# Altium PCB PrintNC_GRBLHAL_Breakout_QWIIC_CARD.pcbdoc (part 1 of 2)
Units mm, origin at the board's own origin, x right, y up, seen from the top; angles counter-clockwise.
Board outline 32.38 x 20 mm, 2 copper layers (Top Layer, Bottom Layer); 19 components, 15 nets, 2519 pads, 22 vias.
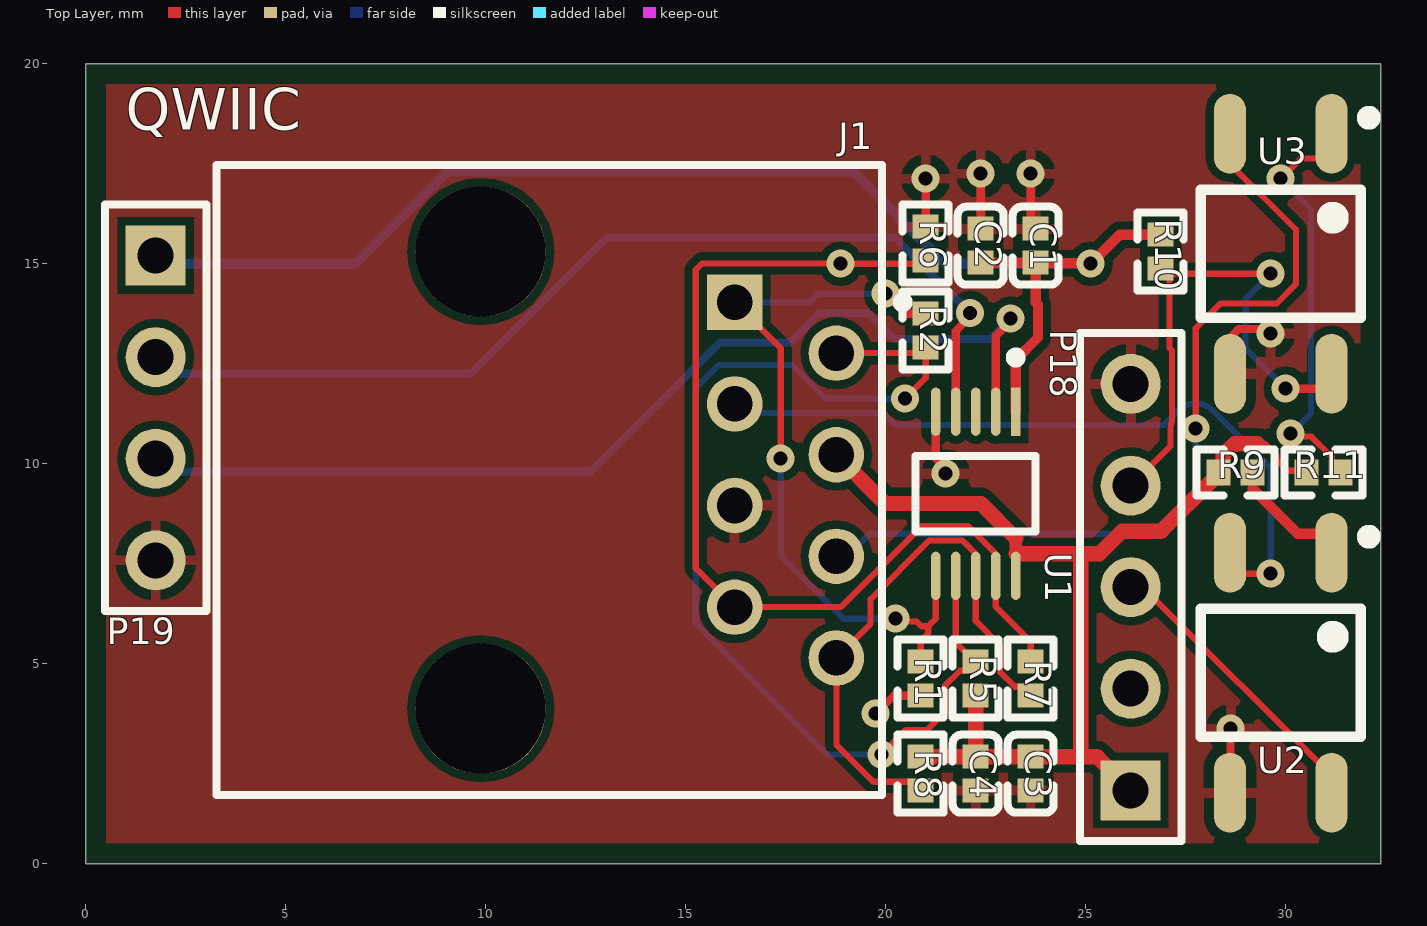
[diagram p0: Top Layer view]
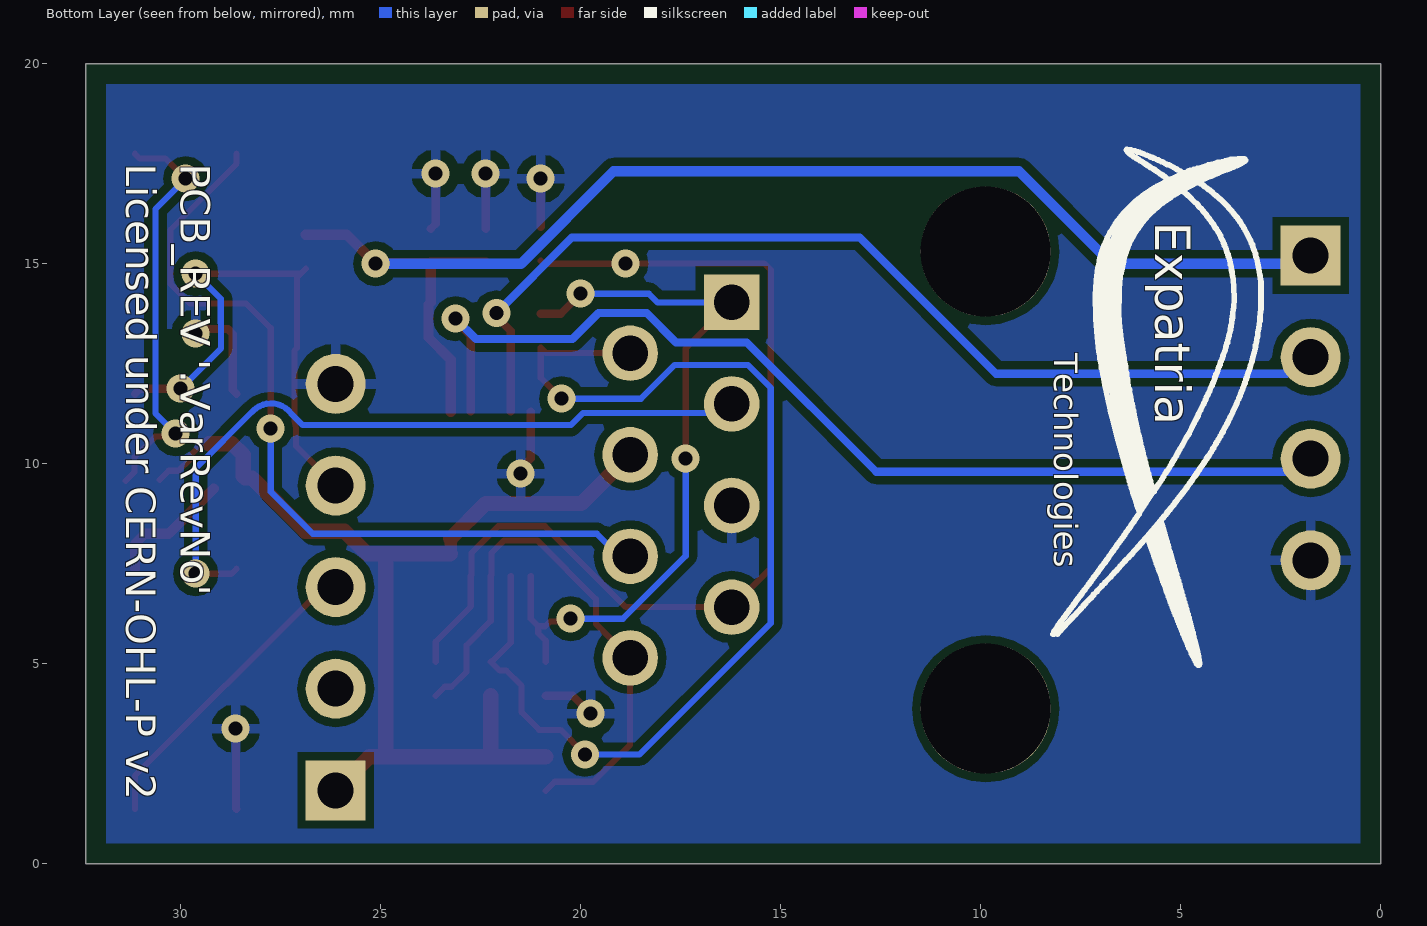
[diagram p1: Bottom Layer view, seen from below]
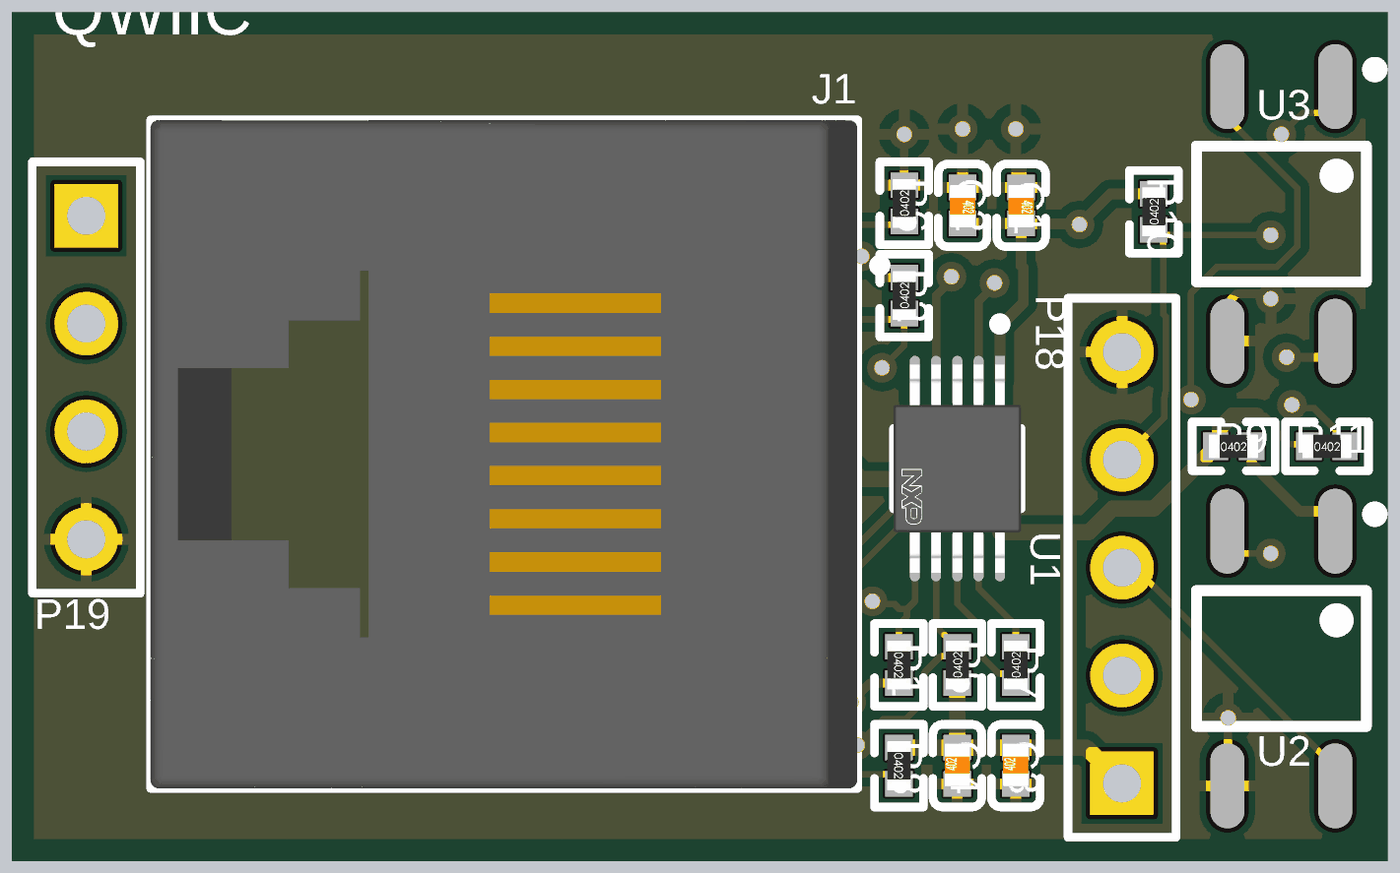
[diagram p3: 3D render of the assembled board from above, using the file's embedded part models]

## Layer stack, top to bottom
Top Solder: solder mask 0.0102, Solder Resist, Dk 3.5
Top Layer: signal copper 0.0356
Dielectric1: dielectric 0.32, FR-4, Dk 4.8
Bottom Layer: signal copper 0.0356
Bottom Solder: solder mask 0.0102, Solder Resist, Dk 3.5

## Board outline
0,0 0,20 32.375,20 32.375,0

## Design rules (kind name [scope] priority, off if disabled: settings)
BoardOutlineClearance [OnLayer('Top Layer')] p1: gap=0.508 ignorepadtopadclearanceinfootprint=FALSE
BoardOutlineClearance BoardOutlineClearance_3 [OnLayer('GND')] p2: gap=0.508 ignorepadtopadclearanceinfootprint=FALSE
BoardOutlineClearance BoardOutlineClearance_2 [OnLayer('PWR')] p3: gap=0.508 ignorepadtopadclearanceinfootprint=FALSE
BoardOutlineClearance BoardOutlineClearance_1 [OnLayer('Bottom Layer')] p4: gap=0.508 ignorepadtopadclearanceinfootprint=FALSE
Clearance [All] p1: gap=0.203 ignorepadtopadclearanceinfootprint=TRUE except(0: SMDPad-Hole Fill-Hole Poly-Hole Region-Hole Text-Hole; 0.254: Arc-Text Arc-Hole Track-Text Track-Hole SMDPad-Text THPad-Text Via-Via Via-Text Fill-Fill Fill-Poly Fill-Region Fill-Text Poly-Poly Poly-Region Poly-Text Region-Region Region-Text Text-Text; 0.305: SMDPad-Via THPad-Via; 0.5: THPad-Hole Via-Hole; 0.508: SMDPad-SMDPad SMDPad-THPad THPad-THPad)
Clearance "Pad Clearance" [IsPad vs IsPad] p2: gap=0.254 ignorepadtopadclearanceinfootprint=TRUE except(0: Arc-Hole Track-Hole SMDPad-Hole THPad-Hole Via-Hole Fill-Hole Poly-Hole Region-Hole Text-Hole; 0.203: Arc-Arc Arc-Track Arc-Fill Arc-Poly Arc-Region Track-Track Track-Fill Track-Poly Track-Region SMDPad-Fill SMDPad-Poly SMDPad-Region THPad-Fill THPad-Poly THPad-Region Via-Fill Via-Poly Via-Region; 0.305: SMDPad-Via THPad-Via; 0.508: SMDPad-SMDPad SMDPad-THPad THPad-THPad)
DiffPairsRouting [All] p1: maxlimit=0.254 minlimit=0.203 mostfreqgap=0.203 toplayer_minwidth=0.152 toplayer_maxwidth=0.381 toplayer_prefwidth=0.254 bottomlayer_minwidth=0.152 bottomlayer_maxwidth=0.381 bottomlayer_prefwidth=0.254 maxuncoupledlength=12.7
HoleSize [All] p1: absolutevalues=TRUE maxlimit=5.08 minlimit=0.025 maxpercent=80.000 minpercent=20.000
MinimumAnnularRing [All] p1: minimumring=0.16
MinimumSolderMaskSliver [All] p1: minsoldermaskwidth=0.127
PolygonConnect [All] p1: connectstyle=Relief reliefconductorwidth=0.254 reliefentries=4 polygonreliefangle="90 Angle" airgapwidth=0.254
RoutingVias [All] p1: holewidth=0.711 width=1.27 viastyle="Through Hole" minholewidth=0.711 minwidth=1.27 maxholewidth=0.711 maxwidth=1.27 useviatemplates=TRUE viatemplateguid#1={29321985-CF2A-4769-A0B6-67998678A9C6} viatemplatename#1=v70h35m0mx0
SilkToSolderMaskClearance SilkscreenOverComponentPads [IsPad] p1: minsilkscreentomaskgap=0.254 clearancetoexposedcopper=TRUE
SolderMaskExpansion [All] p1: expansion=0.102 istentingtop=FALSE
ViasUnderSMD [All] p1: allowed=FALSE
Width [All] p1: maxlimit=5.08 minlimit=0.152 preferedwidth=0.203 minimp=50.000000 maximp=50.000000 favimp=50.000000
26 further rules are at their usual default settings.

## Components (designator, comment, footprint, x,y, rotation, side; value= is the part's Value field where it differs from the comment)
C1 "1.0uF" 0402_C 23.75,15.45 r270 top
C2 "100nF" 0402_C 22.375,15.45 r270 top
C3 "1.0uF" 0402_C 23.625,2.25 r90 top
C4 "100nF" 0402_C 22.25,2.25 r90 top
J1 "5555799-1" FP-5555799-1-MFG 11.585,9.59 r270 top
P18 "Header 5" HDR1X5 26.125,1.835 r90 top (schematic designator P14)
P19 "Header 4" HDR1X4 1.75,15.205 r270 top (schematic designator P15)
R1 "470Ω ±1%" 0402_R 20.875,4.625 r270 top
R2 "100Ω ±1%" 0402_R 21,13.325 r90 top
R5 "470Ω ±1%" 0402_R 22.25,4.625 r90 top
R6 "470Ω ±1%" 0402_R 21,15.5 r90 top
R7 "100Ω ±1%" 0402_R 23.625,4.625 r90 top
R8 "470Ω ±1%" 0402_R 20.875,2.25 r270 top
R9 "680Ω ±1%" 0402_R 28.75,9.775 r0 top
R10 "10KΩ ±1%" 0402_R 26.875,15.3 r90 top
R11 "680Ω ±1%" 0402_R 30.95,9.775 r0 top
U1 "PCA9615DPJ DNI" FP-SOT552-1-IPC_C 22.25,9.25 r270 top
U2 "EL357N(B)(TA)-G" SOP-4_P2.54 29.875,4.775 r270 top
U3 "EL357N(B)(TA)-G" SOP-4_P2.54 29.875,15.25 r270 top

## Footprints (in the part's own frame and the unit in brackets; to place one, negate y for a bottom-side part, rotate by r counter-clockwise, add the part's x,y. Pads: shape width x height; smd on the part's side, far side on the other; paste and mask are expansions set on the pad)
0402_C [mm]
  rect 0.6x0.65 smd mask+0.051: 1(-0.425,0) 2(0.425,0)
  silkscreen extent -0.97,-0.58 0.98,0.58, body extent -0.48,-0.3 0.52,0.3, height 0.2
0402_R [mm]
  rect 0.6x0.65 smd mask+0.051: 1(-0.425,0) 2(0.425,0)
  silkscreen extent -0.97,-0.58 0.97,0.58, body extent -0.57,-0.27 0.58,0.28, height 0.41
FP-5555799-1-MFG [mm]
  rect 1.39x1.39 hole 0.89 paste-1000 mask+0: 1(-4.445,4.64)
  round 1.39 hole 0.89 paste-1000 mask+0: 2(-3.175,7.18) 3(-1.905,4.64) 4(-0.635,7.18) 5(0.635,4.64) 6(1.905,7.18) 7(3.175,4.64) 8(4.445,7.18)
  round 3.25 hole 3.25 unplated paste-1000 mask+0: ""(-5.715,-1.71) ""(5.715,-1.71)
  silkscreen extent -7.88,-8.32 7.88,8.96, body extent -7.98,-8.42 7.98,8.42, height 0.25
FP-SOT552-1-IPC_C [mm]
  rect 1.209x0.236 smd paste+0 mask+0: 1(-2.052,1)
  rrect100% 1.209x0.236 smd paste+0 mask+0: 2(-2.052,0.5) 3(-2.052,0) 4(-2.052,-0.5) 5(-2.052,-1) 6(2.052,-1) 7(2.052,-0.5) 8(2.052,0) 9(2.052,0.5) 10(2.052,1)
  silkscreen extent -3.53,-1.5 0.95,1.5, body extent -2.76,-1.6 2.76,1.6, height 0.25
HDR1X4 [mm] "Connector; Header; 4 Position"
  rect 1.5x1.5 hole 0.9: 1(0,0)
  round 1.5 hole 0.9: 2(2.54,0) 3(5.08,0) 4(7.62,0)
  silkscreen extent -1.27,-1.27 8.89,1.27
HDR1X5 [mm] "Connector; Header; 5 Position"
  rect 1.5x1.5 hole 0.9: 1(0,0)
  round 1.5 hole 0.9: 2(2.54,0) 3(5.08,0) 4(7.62,0) 5(10.16,0)
  silkscreen extent -1.27,-1.27 11.43,1.27
SOP-4_P2.54 [mm]
  oval 2x0.8 smd: 1(-3,1.27) 2(-3,-1.27) 3(3,-1.27) 4(3,1.27)
  silkscreen extent -3.55,-2 1.6,2.35

## Part data
C1 C3: library part "0402 1.0uF (105) 10% 25V", "Chip capacitor", Capacitance=1uF, Manufacturer="Samsung Electro-Mechanics", Package=0402, PartNumber=CL05A105KA5NQNC, SuppliersPartNumber=C52923, Tolerance=10%, Voltage=25V, ComponentLink1Description="Supplier link", ComponentLink1URL=http://www.szlcsc.com/product/details_53938.html, Supplier=LC
C2 C4: library part "0402 100nF (104) 10% 16V", "Chip capacitors", Manufacturer="Samsung Electro-Mechanics", Package=0402, PartNumber=CL05B104KO5NNNC, SuppliersPartNumber=C1525, Tolerance=10%, Voltage=16V, Capacitance=100nF, ComponentLink1Description="Supplier link", ComponentLink1URL=http://www.szlcsc.com/product/details_1877.html, Supplier=LC
J1: library part CMP-03371-000003-1, "CONN MOD JACK 8P8C VERT UNSHLD", Manufacturer="TE Connectivity", SuppliersPartNumber=C305983, Temperature="-40°C to +85°C", Temperature Range High=+85°C, Temperature Range Low=-40°C, Device Class L1=Connectors, Device Class L2="Modular / Ethernet Connectors", Device Class L3=unset, Digikey Description="CONN MOD JACK 8P8C VERT UNSHLD", Is Female=yes, Manufacturer Part Number=5555799-1, Mouser Description="Conn RJ-45 F 8 POS 2.54mm Solder ST Thru-Hole 8 Terminal 1 Port Cat 3 Box/Package/Tray", Number of Contacts=8, Octopart=https://octopart.com/5555799-1-te+connectivity-39526335, Package=5555799-1, Pitch=2.54mm
P18: "Header, 5-Pin", SuppliersPartNumber=C124379, LatestRevisionDate=17-Jul-2002, LatestRevisionNote="Re-released for DXP Platform.", Publisher="Altium Limited"
P19: "Header, 4-Pin", SuppliersPartNumber=C124378, Publisher="Altium Limited"
R1 R5 R6 R8: library part "0402 470R (4700) 1%", "Chip resistor", Manufacturer="Uniroyal Elec", Package=0402, PartNumber=0402WGF4700TCE, Power=1/16W, Resistance=470Ω, SuppliersPartNumber=C25117, Tolerance=1%, ComponentLink1Description="Supplier link", ComponentLink1URL=http://www.szlcsc.com/product/details_25860.html, Supplier=LC
R2 R7: library part "0402 100R (1000) 1%", "Chip resistor", Manufacturer="Uniroyal Elec", Package=0402, PartNumber=0402WGF1000TCE, Power=1/16W, Resistance=100Ω, SuppliersPartNumber=C25076, Tolerance=1%, ComponentLink1Description="Supplier link", ComponentLink1URL=http://www.szlcsc.com/product/details_25819.html, Supplier=LC
R9 R11: library part "0402 680R (6800) 1%", "Chip resistor", Manufacturer="Uniroyal Elec", Package=0402, PartNumber=0402WGF6800TCE, Power=1/16W, Resistance=680Ω, SuppliersPartNumber=C25130, Tolerance=1%, ComponentLink1Description="Supplier link", ComponentLink1URL=http://www.szlcsc.com/product/details_25873.html, Supplier=LC
R10: library part "0402 10K (1002) 1%", "Chip resistor", Manufacturer="Uniroyal Elec", Package=0402, PartNumber=0402WGF1002TCE, Power=1/16W, Resistance=10KΩ, SuppliersPartNumber=C25744, Tolerance=1%, ComponentLink1Description="Supplier link", ComponentLink1URL=http://www.szlcsc.com/product/details_26487.html, Supplier=LC
U1: library part CMP-2000-06881-2, "IC REDRIVER I2C 2CH 10TSSOP", Ambient Temperature Range High=+85°C, Ambient Temperature Range Low=-40°C, Input Capacitance=7pF, Manufacturer=NXP, Manufacturer Part Number=PCA9615DPJ, Max Junction Temp=+125°C, Package=SOT552-1, SuppliersPartNumber=C2652385, Temperature="-40°C to +85°C", Device Class L1="Integrated Circuits (ICs)", Device Class L2="Interface ICs", Device Class L3="Signal Buffers", Digikey Description="IC REDRIVER I2C 2CH 10TSSOP", Footprint Url=https://www.nxp.com/docs/en/package-information/SOT552-1.pdf, Interface=I2C,SMBus, Ipc Land Pattern Name=SOP50P490X110-10, Mouser Description="Interface - Signal Buffers, Repeaters 2-channel multipoint Differential I2C-bus", Octopart=https://octopart.com/pca9615dpj-nxp+semiconductors-34972203, Sigbufrep Type=Buffer,ReDriver, Standoff Height=0.05mm, Temperature Range High=+85°C, Temperature Range Low=-40°C
U2 U3: library part EL357N(B)(TA)-G_[C6649], "贴片光耦", Package=SOP-4_P2.54, SuppliersPartNumber=C6649, ComponentLink1Description=供应商链接, ComponentLink1URL=http://www.szlcsc.com/product/details_7114.html, Supplier=LC

## Free pads (board coordinates)
  round 0.024 on Bottom Overlay: 1(2.989,14.356) 1(2.989,14.356) 1(2.995,13.866) 1(2.995,13.866) 1(2.995,13.937) 1(2.995,13.937) 1(2.995,14.491) 1(2.995,14.491) 1(3.014,14.691) 1(3.014,14.691) 1(3.021,13.57) 1(3.021,13.57) 1(3.021,13.647) 1(3.021,13.647) 1(3.027,14.724) 1(3.027,14.724) 1(3.046,13.389) 1(3.046,13.389) 1(3.046,14.885) 1(3.046,14.885) 1(3.072,13.196) 1(3.072,13.196) 1(3.072,13.273) 1(3.072,13.273) 1(3.079,15.007) 1(3.079,15.007) 1(3.098,13.08) 1(3.098,13.08) 1(3.098,13.118) 1(3.098,13.118) 1(3.098,15.13) 1(3.098,15.13) 1(3.124,15.188) 1(3.124,15.188) 1(3.131,12.925) 1(3.131,12.925) 1(3.131,12.964) 1(3.131,12.964) 1(3.131,15.246) 1(3.131,15.246) 1(3.175,15.362) 1(3.175,15.362) 1(3.208,15.472) 1(3.208,15.472) 1(3.221,12.557) 1(3.221,12.557) 1(3.233,15.51) 1(3.233,15.51) 1(3.253,15.581) 1(3.253,15.581) 1(3.266,12.416) 1(3.266,12.416) 1(3.266,12.441) 1(3.266,12.441) 1(3.337,12.177) 1(3.337,12.177) 1(3.337,12.203) 1(3.337,12.203) 1(3.356,12.132) 1(3.356,12.132) 1(3.356,12.151) 1(3.356,12.151) 1(3.362,15.787) 1(3.362,15.787) 1(3.369,12.1) 1(3.369,12.1) 1(3.369,12.119) 1(3.369,12.119) 1(3.382,17.586) 1(3.382,17.586) 1(3.388,15.833) 1(3.388,15.833) 1(3.388,17.606) 1(3.388,17.606) 1(3.395,12.016) 1(3.395,12.016) 1(3.395,12.041) 1(3.395,12.041) 1(3.395,17.567) 1(3.395,17.567) 1(3.395,17.58) 1(3.395,17.58) 1(3.408,17.618) 1(3.408,17.618) 1(3.414,11.971) 1(3.414,11.971) 1(3.414,11.99) 1(3.414,11.99) 1(3.421,15.884) 1(3.421,15.884) 1(3.427,11.939) 1(3.427,11.939) 1(3.427,11.958) 1(3.427,11.958) 1(3.44,15.929) 1(3.44,15.929) 1(3.44,17.535) 1(3.44,17.535) 1(3.453,11.855) 1(3.453,11.855) 1(3.453,11.88) 1(3.453,11.88) 1(3.466,15.955) 1(3.466,15.955) 1(3.472,11.81) 1(3.472,11.81) 1(3.472,11.829) 1(3.472,11.829) 1(3.472,17.516) 1(3.472,17.516) 1(3.472,17.522) 1(3.472,17.522) 1(3.485,11.777) 1(3.485,11.777) 1(3.485,11.797) 1(3.485,11.797) 1(3.498,11.745) 1(3.498,11.745) 1(3.498,11.764) 1(3.498,11.764) 1(3.498,16.026) 1(3.498,16.026) 1(3.511,11.713) 1(3.511,11.713) 1(3.511,11.732) 1(3.511,11.732) 1(3.517,17.489) 1(3.517,17.489) 1(3.517,17.496) 1(3.517,17.496) 1(3.523,16.052) 1(3.523,16.052) 1(3.53,16.071) 1(3.53,16.071) 1(3.537,11.649) 1(3.537,11.649) 1(3.537,11.668) 1(3.537,11.668) 1(3.55,11.616) 1(3.55,11.616) 1(3.55,11.635) 1(3.55,11.635) 1(3.55,17.477) 1(3.55,17.477) 1(3.55,17.483) 1(3.55,17.483) 1(3.556,16.097) 1(3.556,16.097) 1(3.562,16.116) 1(3.562,16.116) 1(3.562,17.625) 1(3.562,17.625) 1(3.588,11.552) 1(3.588,11.552) 1(3.588,16.142) 1(3.588,16.142) 1(3.588,11.532) 1(3.588,11.532) 1(3.594,16.162) 1(3.594,16.162) 1(3.594,17.457) 1(3.594,17.457) 1(3.594,17.464) 1(3.594,17.464) 1(3.601,11.5) 1(3.601,11.5) 1(3.601,11.52) 1(3.601,11.52) 1(3.614,11.468) 1(3.614,11.468) 1(3.614,11.487) 1(3.614,11.487) 1(3.62,16.181) 1(3.62,16.181) 1(3.627,16.2) 1(3.627,16.2) 1(3.659,16.226) 1(3.659,16.226) 1(3.659,17.431) 1(3.659,17.431) 1(3.659,17.438) 1(3.659,17.438) 1(3.666,14.111) 1(3.666,14.111) 1(3.666,16.245) 1(3.666,16.245) 1(3.672,14.421) 1(3.672,14.421) 1(3.679,13.911) 1(3.679,13.911) 1(3.685,14.601) 1(3.685,14.601) 1(3.691,16.264) 1(3.691,16.264) 1(3.691,17.419) 1(3.691,17.419) 1(3.691,17.425) 1(3.691,17.425) 1(3.698,11.287) 1(3.698,11.287) 1(3.698,11.307) 1(3.698,11.307) 1(3.698,13.782) 1(3.698,13.782) 1(3.698,14.685) 1(3.698,14.685) 1(3.698,16.284) 1(3.698,16.284) 1(3.704,13.66) 1(3.704,13.66) 1(3.711,14.717) 1(3.711,14.717) 1(3.717,13.608) 1(3.717,13.608) 1(3.717,14.801) 1(3.717,14.801) 1(3.723,13.524) 1(3.723,13.524) 1(3.723,16.31) 1(3.723,16.31) 1(3.73,14.833) 1(3.73,14.833) 1(3.73,16.329) 1(3.73,16.329) 1(3.737,14.917) 1(3.737,14.917) 1(3.743,13.454) 1(3.743,13.454) 1(3.749,17.399) 1(3.749,17.399) 1(3.749,17.606) 1(3.749,17.606) 1(3.749,17.393) 1(3.749,17.393) 1(3.756,13.35) 1(3.756,13.35) 1(3.756,14.975) 1(3.756,14.975) 1(3.762,15.033) 1(3.762,15.033) 1(3.775,11.126) 1(3.775,11.126) 1(3.775,11.145) 1(3.775,11.145) 1(3.775,17.593) 1(3.775,17.593) 1(3.781,17.38) 1(3.781,17.38) 1(3.781,17.387) 1(3.781,17.387) 1(3.788,15.136) 1(3.788,15.136) 1(3.794,13.202) 1(3.794,13.202) 1(3.794,16.387) 1(3.794,16.387) 1(3.801,13.157) 1(3.801,13.157) 1(3.801,16.406) 1(3.801,16.406) 1(3.808,15.175) 1(3.808,15.175) 1(3.814,11.042) 1(3.814,11.042) 1(3.814,11.062) 1(3.814,11.062) 1(3.814,13.137) 1(3.814,13.137) 1(3.814,17.367) 1(3.814,17.367) 1(3.814,17.373) 1(3.814,17.373) 1(3.82,15.239) 1(3.82,15.239) 1(3.827,11.023) 1(3.827,11.023) 1(3.827,11.036) 1(3.827,11.036) 1(3.833,13.028) 1(3.833,13.028) 1(3.833,17.586) 1(3.833,17.586) 1(3.846,10.991) 1(3.846,10.991) 1(3.846,11.004) 1(3.846,11.004) 1(3.846,13.008) 1(3.846,13.008) 1(3.846,15.291) 1(3.846,15.291) 1(3.846,17.354) 1(3.846,17.354) 1(3.846,17.36) 1(3.846,17.36) 1(3.859,12.944) 1(3.859,12.944) 1(3.878,10.945) 1(3.878,10.945) 1(3.878,10.933) 1(3.878,10.933) 1(3.878,12.912) 1(3.878,12.912) 1(3.878,15.401) 1(3.878,15.401) 1(3.891,12.841) 1(3.891,12.841) 1(3.891,17.567) 1(3.891,17.567) 1(3.898,17.335) 1(3.898,17.335) 1(3.898,17.341) 1(3.898,17.341) 1(3.904,15.452) 1(3.904,15.452) 1(3.917,15.504) 1(3.917,15.504) 1(3.93,17.328) 1(3.93,17.328) 1(3.93,15.517) 1(3.93,15.517) 1(3.93,17.322) 1(3.93,17.322) 1(3.936,15.549) 1(3.936,15.549) 1(3.943,10.797) 1(3.943,10.797) 1(3.943,10.816) 1(3.943,10.816) 1(3.943,12.706) 1(3.943,12.706) 1(3.956,10.778) 1(3.956,10.778) 1(3.956,10.791) 1(3.956,10.791) 1(3.962,17.309) 1(3.962,17.309) 1(3.962,17.316) 1(3.962,17.316) 1(3.975,10.746) 1(3.975,10.746) 1(3.975,10.758) 1(3.975,10.758) 1(3.975,12.596) 1(3.975,12.596) 1(3.994,12.564) 1(3.994,12.564) 1(3.994,17.296) 1(3.994,17.296) 1(3.994,17.302) 1(3.994,17.302) 1(4.001,15.665) 1(4.001,15.665) 1(4.007,10.701) 1(4.007,10.701) 1(4.007,15.697) 1(4.007,15.697) 1(4.007,10.687) 1(4.007,10.687) 1(4.02,12.474) 1(4.02,12.474) 1(4.02,16.626) 1(4.02,16.626) 1(4.027,17.29) 1(4.027,17.29) 1(4.027,17.283) 1(4.027,17.283) 1(4.033,15.743) 1(4.033,15.743) 1(4.039,10.63) 1(4.039,10.63) 1(4.039,16.632) 1(4.039,16.632) 1(4.046,12.428) 1(4.046,12.428) 1(4.059,10.597) 1(4.059,10.597) 1(4.059,10.61) 1(4.059,10.61) 1(4.059,15.787) 1(4.059,15.787) 1(4.059,17.27) 1(4.059,17.27) 1(4.059,17.277) 1(4.059,17.277) 1(4.065,16.664) 1(4.065,16.664) 1(4.071,17.535) 1(4.071,17.535) 1(4.078,10.565) 1(4.078,10.565) 1(4.078,10.578) 1(4.078,10.578) 1(4.078,15.807) 1(4.078,15.807) 1(4.085,16.671) 1(4.085,16.671) 1(4.091,12.28) 1(4.091,12.28) 1(4.091,15.839) 1(4.091,15.839) 1(4.098,10.533) 1(4.098,10.533) 1(4.098,10.546) 1(4.098,10.546) 1(4.104,17.251) 1(4.104,17.251) 1(4.104,16.697) 1(4.104,16.697) 1(4.104,17.258) 1(4.104,17.258) 1(4.117,10.501) 1(4.117,10.501) 1(4.117,10.514) 1(4.117,10.514) 1(4.117,12.235) 1(4.117,12.235) 1(4.117,15.884) 1(4.117,15.884) 1(4.123,12.203) 1(4.123,12.203) 1(4.123,16.703) 1(4.123,16.703) 1(4.13,15.891) 1(4.13,15.891) 1(4.136,15.91) 1(4.136,15.91) 1(4.136,17.245) 1(4.136,17.245) 1(4.136,17.238) 1(4.136,17.238) 1(4.143,12.17) 1(4.143,12.17) 1(4.143,16.729) 1(4.143,16.729) 1(4.149,10.449) 1(4.149,10.449) 1(4.156,15.929) 1(4.156,15.929) 1(4.162,16.735) 1(4.162,16.735) 1(4.162,17.502) 1(4.162,17.502) 1(4.175,12.061) 1(4.175,12.061) 1(4.175,15.974) 1(4.175,15.974) 1(4.181,10.391) 1(4.181,10.391) 1(4.181,17.219) 1(4.181,17.219) 1(4.181,10.404) 1(4.181,10.404) 1(4.181,17.225) 1(4.181,17.225) 1(4.188,15.981) 1(4.188,15.981) 1(4.194,10.372) 1(4.194,10.372) 1(4.194,10.385) 1(4.194,10.385) 1(4.194,12.029) 1(4.194,12.029) 1(4.194,16) 1(4.194,16) 1(4.2,11.997) 1(4.2,11.997) 1(4.214,10.339) 1(4.214,10.339) 1(4.214,10.353) 1(4.214,10.353) 1(4.214,11.983) 1(4.214,11.983) 1(4.22,11.951) 1(4.22,11.951) 1(4.22,16.026) 1(4.22,16.026) 1(4.22,16.8) 1(4.22,16.8) 1(4.227,16.045) 1(4.227,16.045) 1(4.233,17.193) 1(4.233,17.193) 1(4.239,16.806) 1(4.239,16.806) 1(4.246,10.288) 1(4.246,10.288) 1(4.252,16.071) 1(4.252,16.071) 1(4.259,16.091) 1(4.259,16.091) 1(4.259,16.832) 1(4.259,16.832) 1(4.265,11.868) 1(4.265,11.868) 1(4.278,10.23) 1(4.278,10.23) 1(4.278,10.243) 1(4.278,10.243) 1(4.278,11.816) 1(4.278,11.816) 1(4.285,16.116) 1(4.285,16.116) 1(4.291,10.21) 1(4.291,10.21) 1(4.291,10.224) 1(4.291,10.224) 1(4.291,16.135) 1(4.291,16.135) 1(4.304,10.191) 1(4.304,10.191) 1(4.304,10.204) 1(4.304,10.204) 1(4.304,16.858) 1(4.304,16.858) 1(4.31,11.764) 1(4.31,11.764) 1(4.31,17.47) 1(4.31,17.47) 1(4.317,10.185) 1(4.317,10.185) 1(4.317,11.732) 1(4.317,11.732) 1(4.317,10.172) 1(4.317,10.172) 1(4.323,16.864) 1(4.323,16.864) 1(4.323,17.167) 1(4.323,17.167) 1(4.323,17.161) 1(4.323,17.161) 1(4.329,10.153) 1(4.329,10.153) 1(4.329,10.166) 1(4.329,10.166) 1(4.329,16.174) 1(4.329,16.174) 1(4.336,16.194) 1(4.336,16.194) 1(4.342,10.133) 1(4.342,10.133) 1(4.342,10.146) 1(4.342,10.146) 1(4.349,16.2) 1(4.349,16.2) 1(4.356,10.114) 1(4.356,10.114) 1(4.356,10.127) 1(4.356,10.127) 1(4.356,11.668) 1(4.356,11.668) 1(4.356,16.22) 1(4.356,16.22) 1(4.356,17.148) 1(4.356,17.148) 1(4.356,17.154) 1(4.356,17.154) 1(4.362,11.635) 1(4.362,11.635) 1(4.362,16.903) 1(4.362,16.903) 1(4.375,10.082) 1(4.375,10.082) 1(4.375,10.095) 1(4.375,10.095) 1(4.381,11.603) 1(4.381,11.603) 1(4.381,16.909) 1(4.381,16.909) 1(4.388,11.571) 1(4.388,11.571) 1(4.388,16.922) 1(4.388,16.922) 1(4.394,16.258) 1(4.394,16.258) 1(4.4,10.043) 1(4.4,10.043) 1(4.4,10.056) 1(4.4,10.056) 1(4.4,16.277) 1(4.4,16.277) 1(4.407,16.929) 1(4.407,16.929) 1(4.42,10.017) 1(4.42,10.017) 1(4.42,10.03) 1(4.42,10.03) 1(4.42,11.52) 1(4.42,11.52) 1(4.426,11.487) 1(4.426,11.487) 1(4.426,16.954) 1(4.426,16.954) 1(4.433,16.303) 1(4.433,16.303) 1(4.439,9.991) 1(4.439,9.991) 1(4.439,10.004) 1(4.439,10.004) 1(4.439,16.323) 1(4.439,16.323) 1(4.446,16.961) 1(4.446,16.961) 1(4.452,9.972) 1(4.452,9.972) 1(4.452,9.985) 1(4.452,9.985) 1(4.465,9.953) 1(4.465,9.953) 1(4.465,16.342) 1(4.465,16.342) 1(4.465,9.966) 1(4.465,9.966) 1(4.465,16.98) 1(4.465,16.98) 1(4.471,16.361) 1(4.471,16.361) 1(4.485,9.933) 1(4.485,9.933) 1(4.485,9.92) 1(4.485,9.92) 1(4.497,17.077) 1(4.497,17.077) 1(4.504,11.339) 1(4.504,11.339) 1(4.51,9.882) 1(4.51,9.882) 1(4.51,9.895) 1(4.51,9.895) 1(4.51,17.006) 1(4.51,17.006) 1(4.529,5.008) 1(4.529,5.008) 1(4.529,9.856) 1(4.529,9.856) 1(4.529,9.869) 1(4.529,9.869) 1(4.529,17.012) 1(4.529,17.012) 1(4.529,17.064) 1(4.529,17.064) 1(4.529,17.07) 1(4.529,17.07) 1(4.542,4.962) 1(4.542,4.962) 1(4.542,16.426) 1(4.542,16.426) 1(4.542,17.387) 1(4.542,17.387) 1(4.549,5.169) 1(4.549,5.169) 1(4.549,9.83) 1(4.549,9.83) 1(4.549,9.843) 1(4.549,9.843) 1(4.549,16.445) 1(4.549,16.445) 1(4.555,11.242) 1(4.555,11.242) 1(4.562,9.811) 1(4.562,9.811) 1(4.562,9.824) 1(4.562,9.824) 1(4.562,11.21) 1(4.562,11.21) 1(4.568,4.969) 1(4.568,4.969) 1(4.568,17.051) 1(4.568,17.051) 1(4.575,9.791) 1(4.575,9.791) 1(4.575,9.805) 1(4.575,9.805) 1(4.575,16.464) 1(4.575,16.464) 1(4.581,16.484) 1(4.581,16.484) 1(4.587,17.38) 1(4.587,17.38) 1(4.594,5.349) 1(4.594,5.349) 1(4.594,9.759) 1(4.594,9.759) 1(4.594,9.772) 1(4.594,9.772) 1(4.607,5.008) 1(4.607,5.008) 1(4.613,16.516) 1(4.613,16.516) 1(4.62,9.733) 1(4.62,9.733) 1(4.62,9.72) 1(4.62,9.72) 1(4.626,17.36) 1(4.626,17.36) 1(4.633,5.066) 1(4.633,5.066) 1(4.633,16.522) 1(4.633,16.522) 1(4.639,9.695) 1(4.639,9.695) 1(4.639,9.708) 1(4.639,9.708) 1(4.652,5.588) 1(4.652,5.588) 1(4.658,5.633) 1(4.658,5.633) 1(4.658,9.669) 1(4.658,9.669) 1(4.658,9.682) 1(4.658,9.682) 1(4.665,5.111) 1(4.665,5.111) 1(4.665,11.016) 1(4.665,11.016) 1(4.671,5.653) 1(4.671,5.653) 1(4.671,9.662) 1(4.671,9.662) 1(4.671,9.65) 1(4.671,9.65) 1(4.671,17.354) 1(4.671,17.354) 1(4.678,5.156) 1(4.678,5.156) 1(4.684,9.63) 1(4.684,9.63) 1(4.684,9.643) 1(4.684,9.643) 1(4.691,5.775) 1(4.691,5.775) 1(4.697,9.611) 1(4.697,9.611) 1(4.697,9.624) 1(4.697,9.624) 1(4.71,5.207) 1(4.71,5.207) 1(4.71,9.591) 1(4.71,9.591) 1(4.71,9.605) 1(4.71,9.605) 1(4.716,5.24) 1(4.716,5.24) 1(4.716,5.833) 1(4.716,5.833) 1(4.729,5.253) 1(4.729,5.253) 1(4.729,9.566) 1(4.729,9.566) 1(4.729,9.579) 1(4.729,9.579) 1(4.736,5.285) 1(4.736,5.285) 1(4.748,9.54) 1(4.748,9.54) 1(4.748,9.553) 1(4.748,9.553) 1(4.755,5.988) 1(4.755,5.988) 1(4.762,6.033) 1(4.762,6.033) 1(4.768,9.514) 1(4.768,9.514) 1(4.768,9.527) 1(4.768,9.527) 1(4.768,17.316) 1(4.768,17.316) 1(4.787,6.104) 1(4.787,6.104) 1(4.787,9.489) 1(4.787,9.489) 1(4.787,9.501) 1(4.787,9.501) 1(4.794,5.388) 1(4.794,5.388) 1(4.794,6.149) 1(4.794,6.149) 1(4.794,10.752) 1(4.794,10.752) 1(4.8,5.42) 1(4.8,5.42) 1(4.8,9.469) 1(4.8,9.469) 1(4.8,9.482) 1(4.8,9.482) 1(4.8,16.697) 1(4.8,16.697) 1(4.8,17.309) 1(4.8,17.309) 1(4.813,6.194) 1(4.813,6.194) 1(4.813,9.45) 1(4.813,9.45) 1(4.813,9.462) 1(4.813,9.462) 1(4.813,10.733) 1(4.813,10.733) 1(4.819,5.453) 1(4.819,5.453) 1(4.819,6.239) 1(4.819,6.239) 1(4.819,10.714) 1(4.819,10.714) 1(4.819,16.703) 1(4.819,16.703) 1(4.826,5.485) 1(4.826,5.485) 1(4.826,9.43) 1(4.826,9.43) 1(4.826,9.443) 1(4.826,9.443) 1(4.839,5.497) 1(4.839,5.497) 1(4.839,6.284) 1(4.839,6.284) 1(4.845,5.53) 1(4.845,5.53) 1(4.845,9.405) 1(4.845,9.405) 1(4.845,9.418) 1(4.845,9.418) 1(4.845,16.735) 1(4.845,16.735) 1(4.852,6.355) 1(4.852,6.355) 1(4.852,10.668) 1(4.852,10.668) 1(4.852,17.283) 1(4.852,17.283) 1(4.865,5.556) 1(4.865,5.556) 1(4.865,9.379) 1(4.865,9.379) 1(4.865,9.392) 1(4.865,9.392) 1(4.865,16.742) 1(4.865,16.742) 1(4.871,5.588) 1(4.871,5.588) 1(4.871,6.4) 1(4.871,6.4) 1(4.877,6.445) 1(4.877,6.445) 1(4.877,10.623) 1(4.877,10.623) 1(4.884,9.353) 1(4.884,9.353) 1(4.884,9.366) 1(4.884,9.366) 1(4.884,16.768) 1(4.884,16.768) 1(4.884,17.277) 1(4.884,17.277) 1(4.897,5.633) 1(4.897,5.633) 1(4.897,6.491) 1(4.897,6.491) 1(4.904,5.665) 1(4.904,5.665) 1(4.904,6.535) 1(4.904,6.535) 1(4.904,9.327) 1(4.904,9.327) 1(4.904,9.34) 1(4.904,9.34) 1(4.904,16.774) 1(4.904,16.774) 1(4.916,5.678) 1(4.916,5.678) 1(4.916,17.258) 1(4.916,17.258) 1(4.923,6.581) 1(4.923,6.581) 1(4.923,9.314) 1(4.923,9.314) 1(4.923,16.8) 1(4.923,16.8) 1(4.923,17.264) 1(4.923,17.264) 1(4.923,5.71) 1(4.923,5.71) 1(4.923,9.301) 1(4.923,9.301) 1(4.929,6.626) 1(4.929,6.626) 1(4.942,5.743) 1(4.942,5.743) 1(4.942,9.276) 1(4.942,9.276) 1(4.942,9.289) 1(4.942,9.289) 1(4.942,16.806) 1(4.942,16.806) 1(4.948,5.775) 1(4.948,5.775) 1(4.948,6.671) 1(4.948,6.671) 1(4.948,10.488) 1(4.948,10.488) 1(4.955,6.716) 1(4.955,6.716) 1(4.955,17.277) 1(4.955,17.277) 1(4.962,9.25) 1(4.962,9.25) 1(4.962,9.263) 1(4.962,9.263) 1(4.974,5.826) 1(4.974,5.826) 1(4.974,6.761) 1(4.974,6.761) 1(4.974,10.443) 1(4.974,10.443) 1(4.974,16.832) 1(4.974,16.832) 1(4.974,16.839) 1(4.974,16.839) 1(4.981,5.859) 1(4.981,5.859) 1(4.981,6.806) 1(4.981,6.806) 1(4.981,9.224) 1(4.981,9.224) 1(4.981,9.237) 1(4.981,9.237) 1(5,5.891) 1(5,5.891) 1(5,6.851) 1(5,6.851) 1(5,9.211) 1(5,9.211) 1(5,9.199) 1(5,9.199) 1(5,10.397) 1(5,10.397) 1(5,17.309) 1(5,17.309) 1(5.006,5.923) 1(5.006,5.923) 1(5.006,16.812) 1(5.006,16.812) 1(5.006,16.819) 1(5.006,16.819) 1(5.013,6.922) 1(5.013,6.922) 1(5.019,5.936) 1(5.019,5.936) 1(5.026,5.968) 1(5.026,5.968) 1(5.026,6.942) 1(5.026,6.942) 1(5.026,10.353) 1(5.026,10.353) 1(5.033,6.987) 1(5.033,6.987) 1(5.033,9.16) 1(5.033,9.16) 1(5.033,9.172) 1(5.033,9.172) 1(5.045,6.001) 1(5.045,6.001) 1(5.052,16.787) 1(5.052,16.787) 1(5.052,6.033) 1(5.052,6.033) 1(5.052,7.032) 1(5.052,7.032) 1(5.052,10.307) 1(5.052,10.307) 1(5.052,16.793) 1(5.052,16.793) 1(5.058,7.077) 1(5.058,7.077) 1(5.065,9.121) 1(5.065,9.121) 1(5.065,9.134) 1(5.065,9.134) 1(5.071,6.065) 1(5.071,6.065) 1(5.071,7.097) 1(5.071,7.097) 1(5.077,6.097) 1(5.077,6.097) 1(5.077,7.141) 1(5.077,7.141) 1(5.077,10.262) 1(5.077,10.262) 1(5.084,9.095) 1(5.084,9.095) 1(5.084,9.108) 1(5.084,9.108) 1(5.084,16.768) 1(5.084,16.768) 1(5.084,16.774) 1(5.084,16.774) 1(5.084,17.354) 1(5.084,17.354) 1(5.097,7.187) 1(5.097,7.187) 1(5.103,6.149) 1(5.103,6.149) 1(5.103,7.232) 1(5.103,7.232) 1(5.103,9.07) 1(5.103,9.07) 1(5.103,9.082) 1(5.103,9.082) 1(5.103,10.217) 1(5.103,10.217) 1(5.11,6.181) 1(5.11,6.181) 1(5.116,10.185) 1(5.116,10.185) 1(5.116,16.748) 1(5.116,16.748) 1(5.116,16.754) 1(5.116,16.754) 1(5.116,17.367) 1(5.116,17.367) 1(5.123,9.056) 1(5.123,9.056) 1(5.123,9.043) 1(5.123,9.043) 1(5.129,6.213) 1(5.129,6.213) 1(5.129,7.297) 1(5.129,7.297) 1(5.135,6.245) 1(5.135,6.245) 1(5.135,7.341) 1(5.135,7.341) 1(5.142,9.018) 1(5.142,9.018) 1(5.142,9.031) 1(5.142,9.031) 1(5.148,10.139) 1(5.148,10.139) 1(5.148,16.735) 1(5.148,16.735) 1(5.148,16.729) 1(5.148,16.729) 1(5.155,6.278) 1(5.155,6.278) 1(5.155,10.12) 1(5.155,10.12) 1(5.161,6.31) 1(5.161,6.31) 1(5.161,7.406) 1(5.161,7.406) 1(5.161,8.992) 1(5.161,8.992) 1(5.161,9.005) 1(5.161,9.005) 1(5.161,17.399) 1(5.161,17.399) 1(5.168,7.451) 1(5.168,7.451) 1(5.181,16.716) 1(5.181,16.716) 1(5.181,6.342) 1(5.181,6.342) 1(5.181,7.47) 1(5.181,7.47) 1(5.181,8.966) 1(5.181,8.966) 1(5.181,8.979) 1(5.181,8.979) 1(5.181,16.71) 1(5.181,16.71) 1(5.187,6.374) 1(5.187,6.374) 1(5.187,7.516) 1(5.187,7.516) 1(5.194,10.069) 1(5.194,10.069) 1(5.2,16.697) 1(5.2,16.697) 1(5.2,16.703) 1(5.2,16.703) 1(5.206,6.407) 1(5.206,6.407) 1(5.206,7.561) 1(5.206,7.561) 1(5.213,8.928) 1(5.213,8.928) 1(5.213,6.439) 1(5.213,6.439) 1(5.213,7.606) 1(5.213,7.606) 1(5.213,8.941) 1(5.213,8.941) 1(5.219,10.024) 1(5.219,10.024) 1(5.219,16.683) 1(5.219,16.683) 1(5.219,16.69) 1(5.219,16.69) 1(5.232,6.471) 1(5.232,6.471) 1(5.232,7.651) 1(5.232,7.651) 1(5.232,9.991) 1(5.232,9.991) 1(5.239,6.503) 1(5.239,6.503) 1(5.239,7.696) 1(5.239,7.696) 1(5.239,8.895) 1(5.239,8.895) 1(5.239,8.908) 1(5.239,8.908) 1(5.239,16.671) 1(5.239,16.671) 1(5.239,16.677) 1(5.239,16.677) 1(5.258,6.535) 1(5.258,6.535) 1(5.258,7.741) 1(5.258,7.741) 1(5.258,16.658) 1(5.258,16.658) 1(5.258,16.664) 1(5.258,16.664) 1(5.264,7.786) 1(5.264,7.786) 1(5.264,9.946) 1(5.264,9.946) 1(5.271,8.857) 1(5.271,8.857) 1(5.271,8.87) 1(5.271,8.87) 1(5.277,6.606) 1(5.277,6.606) 1(5.277,16.645) 1(5.277,16.645) 1(5.277,16.651) 1(5.277,16.651) 1(5.284,7.832) 1(5.284,7.832) 1(5.284,9.901) 1(5.284,9.901) 1(5.296,7.903) 1(5.296,7.903) 1(5.296,17.09) 1(5.296,17.09) 1(5.303,8.818) 1(5.303,8.818) 1(5.303,8.831) 1(5.303,8.831) 1(5.303,9.882) 1(5.303,9.882) 1(5.31,6.678) 1(5.31,6.678) 1(5.31,7.922) 1(5.31,7.922) 1(5.31,9.862) 1(5.31,9.862) 1(5.31,17.109) 1(5.31,17.109) 1(5.31,17.477) 1(5.31,17.477) 1(5.316,7.967) 1(5.316,7.967) 1(5.323,8.792) 1(5.323,8.792) 1(5.323,8.805) 1(5.323,8.805) 1(5.323,16.613) 1(5.323,16.613) 1(5.323,16.619) 1(5.323,16.619) 1(5.329,9.843) 1(5.329,9.843) 1(5.329,17.116) 1(5.329,17.116) 1(5.329,6.749) 1(5.329,6.749) 1(5.335,8.012) 1(5.335,8.012) 1(5.335,9.824) 1(5.335,9.824) 1(5.335,17.129) 1(5.335,17.129) 1(5.342,8.057) 1(5.342,8.057) 1(5.342,8.766) 1(5.342,8.766) 1(5.342,8.779) 1(5.342,8.779) 1(5.342,17.483) 1(5.342,17.483) 1(5.348,16.593) 1(5.348,16.593) 1(5.348,16.6) 1(5.348,16.6) 1(5.355,9.805) 1(5.355,9.805) 1(5.355,17.135) 1(5.355,17.135) 1(5.361,8.741) 1(5.361,8.741) 1(5.361,6.819) 1(5.361,6.819) 1(5.361,8.753) 1(5.361,8.753) 1(5.361,9.785) 1(5.361,9.785) 1(5.361,17.148) 1(5.361,17.148) 1(5.367,8.122) 1(5.367,8.122) 1(5.367,16.581) 1(5.367,16.581) 1(5.367,16.587) 1(5.367,16.587) 1(5.374,8.167) 1(5.374,8.167) 1(5.381,9.766) 1(5.381,9.766) 1(5.381,17.154) 1(5.381,17.154) 1(5.387,17.167) 1(5.387,17.167) 1(5.387,9.747) 1(5.387,9.747) 1(5.393,8.212) 1(5.393,8.212) 1(5.393,16.561) 1(5.393,16.561) 1(5.393,16.568) 1(5.393,16.568) 1(5.4,8.257) 1(5.4,8.257) 1(5.406,6.968) 1(5.406,6.968) 1(5.406,17.032) 1(5.406,17.032) 1(5.406,17.174) 1(5.406,17.174) 1(5.413,16.548) 1(5.413,16.548) 1(5.413,16.554) 1(5.413,16.554) 1(5.419,8.302) 1(5.419,8.302) 1(5.419,8.676) 1(5.419,8.676) 1(5.419,8.689) 1(5.419,8.689) 1(5.425,7) 1(5.425,7) 1(5.425,8.347) 1(5.425,8.347) 1(5.425,9.695) 1(5.425,9.695) 1(5.432,7.032) 1(5.432,7.032) 1(5.432,8.657) 1(5.432,8.657) 1(5.432,8.67) 1(5.432,8.67) 1(5.432,9.676) 1(5.432,9.676) 1(5.432,17.199) 1(5.432,17.199) 1(5.439,16.529) 1(5.439,16.529) 1(5.439,16.535) 1(5.439,16.535) 1(5.445,8.393) 1(5.445,8.393) 1(5.452,7.064) 1(5.452,7.064) 1(5.452,8.438) 1(5.452,8.438) 1(5.452,17.206) 1(5.452,17.206) 1(5.458,16.516) 1(5.458,16.516) 1(5.458,16.522) 1(5.458,16.522) 1(5.458,17.219) 1(5.458,17.219) 1(5.458,17.548) 1(5.458,17.548) 1(5.464,8.618) 1(5.464,8.618) 1(5.464,8.631) 1(5.464,8.631) 1(5.464,9.63) 1(5.464,9.63) 1(5.471,8.483) 1(5.471,8.483) 1(5.471,9.611) 1(5.471,9.611) 1(5.484,16.497) 1(5.484,16.497) 1(5.484,8.592) 1(5.484,8.592) 1(5.484,8.605) 1(5.484,8.605) 1(5.484,16.503) 1(5.484,16.503) 1(5.49,17.231) 1(5.49,17.231) 1(5.49,17.554) 1(5.49,17.554) 1(5.496,8.586) 1(5.496,8.586) 1(5.503,9.566) 1(5.503,9.566) 1(5.503,16.484) 1(5.503,16.484) 1(5.503,16.49) 1(5.503,16.49) 1(5.51,9.547) 1(5.51,9.547) 1(5.51,17.251) 1(5.51,17.251) 1(5.516,7.27) 1(5.516,7.27) 1(5.529,9.527) 1(5.529,9.527) 1(5.529,16.464) 1(5.529,16.464) 1(5.529,16.471) 1(5.529,16.471) 1(5.529,17.258) 1(5.529,17.258) 1(5.535,9.508) 1(5.535,9.508) 1(5.548,7.341) 1(5.548,7.341) 1(5.548,16.445) 1(5.548,16.445) 1(5.548,17.277) 1(5.548,17.277) 1(5.554,9.489) 1(5.554,9.489) 1(5.561,9.469) 1(5.561,9.469) 1(5.561,17.593) 1(5.561,17.593) 1(5.567,16.432) 1(5.567,16.432) 1(5.567,16.439) 1(5.567,16.439) 1(5.567,17.283) 1(5.567,17.283) 1(5.574,7.432) 1(5.574,7.432) 1(5.581,9.45) 1(5.581,9.45) 1(5.581,16.941) 1(5.581,16.941) 1(5.587,9.43) 1(5.587,9.43) 1(5.593,16.406) 1(5.593,16.406) 1(5.593,17.309) 1(5.593,17.309) 1(5.593,17.599) 1(5.593,17.599) 1(5.6,16.935) 1(5.6,16.935) 1(5.606,7.503) 1(5.606,7.503) 1(5.606,9.411) 1(5.606,9.411) 1(5.613,9.392) 1(5.613,9.392) 1(5.613,16.393) 1(5.613,16.393) 1(5.613,16.4) 1(5.613,16.4) 1(5.613,17.316) 1(5.613,17.316) 1(5.632,7.593) 1(5.632,7.593) 1(5.632,9.372) 1(5.632,9.372) 1(5.632,17.335) 1(5.632,17.335) 1(5.645,16.903) 1(5.645,16.903) 1(5.651,17.341) 1(5.651,17.341) 1(5.658,17.354) 1(5.658,17.354) 1(5.658,17.638) 1(5.658,17.638) 1(5.664,7.664) 1(5.664,7.664) 1(5.664,9.321) 1(5.664,9.321) 1(5.664,16.896) 1(5.664,16.896) 1(5.671,9.301) 1(5.671,9.301) 1(5.677,16.329) 1(5.677,16.329) 1(5.683,16.877) 1(5.683,16.877) 1(5.69,7.754) 1(5.69,7.754) 1(5.69,9.295) 1(5.69,9.295) 1(5.69,17.367) 1(5.69,17.367) 1(5.69,17.644) 1(5.69,17.644) 1(5.696,16.316) 1(5.696,16.316) 1(5.696,16.323) 1(5.696,16.323) 1(5.703,16.871) 1(5.703,16.871) 1(5.71,9.366) 1(5.71,9.366) 1(5.716,9.411) 1(5.716,9.411) 1(5.722,16.851) 1(5.722,16.851) 1(5.722,17.664) 1(5.722,17.664) 1(5.735,17.399) 1(5.735,17.399) 1(5.742,9.482) 1(5.742,9.482) 1(5.742,16.845) 1(5.742,16.845) 1(5.748,7.922) 1(5.748,7.922) 1(5.748,16.832) 1(5.748,16.832) 1(5.754,9.553) 1(5.754,9.553) 1(5.754,17.406) 1(5.754,17.406) 1(5.754,17.67) 1(5.754,17.67) 1(5.767,16.825) 1(5.767,16.825) 1(5.78,17.689) 1(5.78,17.689) 1(5.787,9.65) 1(5.787,9.65) 1(5.806,9.747) 1(5.806,9.747) 1(5.806,17.445) 1(5.806,17.445) 1(5.812,16.793) 1(5.812,16.793) 1(5.825,9.791) 1(5.825,9.791) 1(5.825,17.451) 1(5.825,17.451) 1(5.832,16.787) 1(5.832,16.787) 1(5.838,8.18) 1(5.838,8.18) 1(5.838,9.862) 1(5.838,9.862) 1(5.844,17.47) 1(5.844,17.47) 1(5.851,8.16) 1(5.851,8.16) 1(5.851,8.173) 1(5.851,8.173) 1(5.851,16.768) 1(5.851,16.768) 1(5.851,17.709) 1(5.851,17.709) 1(5.864,9.933) 1(5.864,9.933) 1(5.864,17.477) 1(5.864,17.477) 1(5.871,16.135) 1(5.871,16.135) 1(5.871,16.149) 1(5.871,16.149) 1(5.871,16.761) 1(5.871,16.761) 1(5.877,10.024) 1(5.877,10.024) 1(5.883,17.496) 1(5.883,17.496) 1(5.89,16.742) 1(5.89,16.742) 1(5.896,10.069) 1(5.896,10.069) 1(5.903,10.127) 1(5.903,10.127) 1(5.903,16.097) 1(5.903,16.097) 1(5.903,16.11) 1(5.903,16.11) 1(5.903,17.502) 1(5.903,17.502) 1(5.909,16.735) 1(5.909,16.735) 1(5.916,8.089) 1(5.916,8.089) 1(5.916,8.103) 1(5.916,8.103) 1(5.916,16.722) 1(5.916,16.722) 1(5.922,10.172) 1(5.922,10.172) 1(5.922,17.522) 1(5.922,17.522) 1(5.935,16.716) 1(5.935,16.716) 1(5.941,16.052) 1(5.941,16.052) 1(5.941,17.528) 1(5.941,17.528) 1(5.941,16.065) 1(5.941,16.065) 1(5.941,16.703) 1(5.941,16.703) 1(5.941,17.754) 1(5.941,17.754) 1(5.948,8.051) 1(5.948,8.051) 1(5.948,8.064) 1(5.948,8.064) 1(5.954,10.307) 1(5.954,10.307) 1(5.961,16.697) 1(5.961,16.697) 1(5.961,17.548) 1(5.961,17.548) 1(5.967,16.683) 1(5.967,16.683) 1(5.973,10.404) 1(5.973,10.404) 1(5.973,16.013) 1(5.973,16.013) 1(5.973,16.026) 1(5.973,16.026) 1(5.973,17.76) 1(5.973,17.76) 1(5.987,16.677) 1(5.987,16.677) 1(5.993,7.999) 1(5.993,7.999) 1(5.993,8.012) 1(5.993,8.012) 1(5.993,15.987) 1(5.993,15.987) 1(5.993,16) 1(5.993,16) 1(6,16.658) 1(6,16.658) 1(6.006,10.501) 1(6.006,10.501) 1(6.006,15.968) 1(6.006,15.968) 1(6.006,15.981) 1(6.006,15.981) 1(6.019,16.651) 1(6.019,16.651) 1(6.019,17.573) 1(6.019,17.573) 1(6.025,15.942) 1(6.025,15.942) 1(6.025,15.955) 1(6.025,15.955) 1(6.025,17.786) 1(6.025,17.786) 1(6.032,8.779) 1(6.032,8.779) 1(6.038,8.76) 1(6.038,8.76) 1(6.038,10.687) 1(6.038,10.687) 1(6.038,15.923) 1(6.038,15.923) 1(6.038,15.936) 1(6.038,15.936) 1(6.038,16.626) 1(6.038,16.626) 1(6.038,17.593) 1(6.038,17.593) 1(6.044,7.941) 1(6.044,7.941) 1(6.044,7.954) 1(6.044,7.954) 1(6.044,8.741) 1(6.044,8.741) 1(6.058,10.733) 1(6.058,10.733) 1(6.058,15.897) 1(6.058,15.897) 1(6.058,15.91) 1(6.058,15.91) 1(6.058,16.619) 1(6.058,16.619) 1(6.058,17.599) 1(6.058,17.599) 1(6.07,8.715) 1(6.07,8.715) 1(6.07,15.878) 1(6.07,15.878) 1(6.07,15.891) 1(6.07,15.891) 1(6.07,17.793) 1(6.07,17.793) 1(6.077,8.695) 1(6.077,8.695) 1(6.077,16.593) 1(6.077,16.593) 1(6.077,17.618) 1(6.077,17.618) 1(6.09,7.889) 1(6.09,7.889) 1(6.09,7.903) 1(6.09,7.903) 1(6.09,10.875) 1(6.09,10.875) 1(6.09,15.852) 1(6.09,15.852) 1(6.09,15.865) 1(6.09,15.865) 1(6.096,8.676) 1(6.096,8.676) 1(6.096,16.587) 1(6.096,16.587) 1(6.096,17.625) 1(6.096,17.625) 1(6.102,8.657) 1(6.102,8.657) 1(6.102,15.833) 1(6.102,15.833) 1(6.102,8.973) 1(6.102,8.973) 1(6.102,15.845) 1(6.102,15.845) 1(6.102,17.638) 1(6.102,17.638) 1(6.109,9.018) 1(6.109,9.018) 1(6.115,15.813) 1(6.115,15.813) 1(6.115,15.826) 1(6.115,15.826) 1(6.115,16.561) 1(6.115,16.561) 1(6.122,8.637) 1(6.122,8.637) 1(6.122,11.055) 1(6.122,11.055) 1(6.122,17.644) 1(6.122,17.644) 1(6.129,8.618) 1(6.129,8.618) 1(6.129,15.794) 1(6.129,15.794) 1(6.129,15.807) 1(6.129,15.807) 1(6.129,9.063) 1(6.129,9.063) 1(6.129,17.657) 1(6.129,17.657) 1(6.135,9.108) 1(6.135,9.108) 1(6.135,16.554) 1(6.135,16.554) 1(6.141,11.101) 1(6.141,11.101) 1(6.141,15.775) 1(6.141,15.775) 1(6.141,15.787) 1(6.141,15.787) 1(6.148,8.599) 1(6.148,8.599) 1(6.148,17.825) 1(6.148,17.825) 1(6.154,8.58) 1(6.154,8.58) 1(6.154,15.755) 1(6.154,15.755) 1(6.154,15.768) 1(6.154,15.768) 1(6.154,16.529) 1(6.154,16.529) 1(6.161,7.812) 1(6.161,7.812) 1(6.161,7.825) 1(6.161,7.825) 1(6.167,11.203) 1(6.167,11.203) 1(6.173,8.56) 1(6.173,8.56) 1(6.173,15.723) 1(6.173,15.723) 1(6.173,15.736) 1(6.173,15.736) 1(6.173,16.522) 1(6.173,16.522) 1(6.18,8.541) 1(6.18,8.541) 1(6.18,11.326) 1(6.18,11.326) 1(6.187,7.78) 1(6.187,7.78) 1(6.187,7.793) 1(6.187,7.793) 1(6.187,17.683) 1(6.187,17.683) 1(6.199,9.289) 1(6.199,9.289) 1(6.206,8.515) 1(6.206,8.515) 1(6.206,9.334) 1(6.206,9.334) 1(6.206,11.41) 1(6.206,11.41) 1(6.206,17.702) 1(6.206,17.702) 1(6.212,8.495) 1(6.212,8.495) 1(6.219,11.5) 1(6.219,11.5) 1(6.225,17.709) 1(6.225,17.709) 1(6.225,17.838) 1(6.225,17.838) 1(6.231,7.728) 1(6.231,7.728) 1(6.231,7.741) 1(6.231,7.741) 1(6.231,8.476) 1(6.231,8.476) 1(6.231,9.392) 1(6.231,9.392) 1(6.238,8.457) 1(6.238,8.457) 1(6.238,9.437) 1(6.238,9.437) 1(6.244,11.59) 1(6.244,11.59) 1(6.244,17.728) 1(6.244,17.728) 1(6.251,7.716) 1(6.251,7.716) 1(6.251,7.722) 1(6.251,7.722) 1(6.251,11.674) 1(6.251,11.674) 1(6.251,17.85) 1(6.251,17.85) 1(6.258,9.476) 1(6.258,9.476) 1(6.264,8.431) 1(6.264,8.431) 1(6.264,9.521) 1(6.264,9.521) 1(6.264,17.735) 1(6.264,17.735) 1(6.27,8.412) 1(6.27,8.412) 1(6.27,17.747) 1(6.27,17.747) 1(6.277,11.764) 1(6.277,11.764) 1(6.283,9.566) 1(6.283,9.566) 1(6.283,11.848) 1(6.283,11.848) 1(6.29,7.67) 1(6.29,7.67) 1(6.29,7.683) 1(6.29,7.683) 1(6.29,8.393) 1(6.29,8.393) 1(6.29,9.611) 1(6.29,9.611) 1(6.29,15.485) 1(6.29,15.485) 1(6.29,15.504) 1(6.29,15.504) 1(6.29,17.754) 1(6.29,17.754) 1(6.296,8.373) 1(6.296,8.373) 1(6.296,11.874) 1(6.296,11.874) 1(6.309,8.366) 1(6.309,8.366) 1(6.309,9.656) 1(6.309,9.656) 1(6.309,15.439) 1(6.309,15.439) 1(6.309,15.458) 1(6.309,15.458) 1(6.315,8.347) 1(6.315,8.347) 1(6.315,9.701) 1(6.315,9.701) 1(6.322,12.016) 1(6.322,12.016) 1(6.322,15.407) 1(6.322,15.407) 1(6.322,15.426) 1(6.322,15.426) 1(6.328,12.1) 1(6.328,12.1) 1(6.335,8.328) 1(6.335,8.328) 1(6.335,9.747) 1(6.335,9.747) 1(6.341,8.309) 1(6.341,8.309) 1(6.341,9.791) 1(6.341,9.791) 1(6.341,15.356) 1(6.341,15.356) 1(6.341,15.375) 1(6.341,15.375) 1(6.341,17.806) 1(6.341,17.806) 1(6.348,12.177) 1(6.348,12.177) 1(6.348,17.857) 1(6.348,17.857) 1(6.354,17.844) 1(6.354,17.844) 1(6.354,12.261) 1(6.354,12.261) 1(6.36,9.837) 1(6.36,9.837) 1(6.367,8.283) 1(6.367,8.283) 1(6.367,9.882) 1(6.367,9.882) 1(6.367,15.285) 1(6.367,15.285) 1(6.367,15.304) 1(6.367,15.304) 1(6.373,12.319) 1(6.373,12.319) 1(6.38,12.422) 1(6.38,12.422) 1(6.386,9.927) 1(6.386,9.927) 1(6.386,15.22) 1(6.386,15.22) 1(6.386,15.246) 1(6.386,15.246) 1(6.392,7.561) 1(6.392,7.561) 1(6.392,7.574) 1(6.392,7.574) 1(6.399,8.231) 1(6.399,8.231) 1(6.399,9.998) 1(6.399,9.998) 1(6.399,15.188) 1(6.399,15.188) 1(6.399,15.207) 1(6.399,15.207) 1(6.406,8.212) 1(6.406,8.212) 1(6.412,12.583) 1(6.412,12.583) 1(6.412,15.143) 1(6.412,15.143) 1(6.412,16.284) 1(6.412,16.284) 1(6.419,8.205) 1(6.419,8.205) 1(6.419,12.654) 1(6.419,12.654) 1(6.419,16.264) 1(6.419,16.264) 1(6.425,8.186) 1(6.425,8.186) 1(6.425,10.069) 1(6.425,10.069) 1(6.431,12.686) 1(6.431,12.686) 1(6.431,15.052) 1(6.431,15.052) 1(6.431,15.085) 1(6.431,15.085) 1(6.431,10.114) 1(6.431,10.114) 1(6.438,8.18) 1(6.438,8.18) 1(6.444,8.16) 1(6.444,8.16) 1(6.444,15.001) 1(6.444,15.001) 1(6.444,15.033) 1(6.444,15.033) 1(6.444,16.245) 1(6.444,16.245) 1(6.451,7.496) 1(6.451,7.496) 1(6.451,7.509) 1(6.451,7.509) 1(6.451,10.159) 1(6.451,10.159) 1(6.451,16.226) 1(6.451,16.226) 1(6.457,8.154) 1(6.457,8.154) 1(6.457,10.204) 1(6.457,10.204) 1(6.457,14.937) 1(6.457,14.937) 1(6.457,14.975) 1(6.457,14.975) 1(6.464,8.135) 1(6.464,8.135) 1(6.47,14.878) 1(6.47,14.878) 1(6.47,14.91) 1(6.47,14.91) 1(6.477,8.128) 1(6.477,8.128) 1(6.477,10.249) 1(6.477,10.249) 1(6.483,8.109) 1(6.483,8.109) 1(6.483,10.295) 1(6.483,10.295) 1(6.483,14.82) 1(6.483,14.82) 1(6.483,14.853) 1(6.483,14.853) 1(6.483,16.2) 1(6.483,16.2) 1(6.489,16.181) 1(6.489,16.181) 1(6.496,8.103) 1(6.496,8.103) 1(6.496,14.762) 1(6.496,14.762) 1(6.496,14.795) 1(6.496,14.795) 1(6.502,8.083) 1(6.502,8.083) 1(6.502,10.339) 1(6.502,10.339) 1(6.502,13.196) 1(6.502,13.196) 1(6.509,10.385) 1(6.509,10.385) 1(6.509,13.331) 1(6.509,13.331) 1(6.509,14.64) 1(6.509,14.64) 1(6.509,14.704) 1(6.509,14.704) 1(6.515,8.076) 1(6.515,8.076) 1(6.515,16.162) 1(6.515,16.162) 1(6.521,7.432) 1(6.521,7.432) 1(6.521,8.057) 1(6.521,8.057) 1(6.521,13.395) 1(6.521,13.395) 1(6.521,14.582) 1(6.521,14.582) 1(6.521,7.419) 1(6.521,7.419) 1(6.521,14.518) 1(6.521,14.518) 1(6.521,16.142) 1(6.521,16.142) 1(6.528,10.43) 1(6.528,10.43) 1(6.535,10.475) 1(6.535,10.475) 1(6.541,14.26) 1(6.541,14.26) 1(6.541,14.389) 1(6.541,14.389) 1(6.541,16.129) 1(6.541,16.129) 1(6.548,16.11) 1(6.548,16.11) 1(6.548,8.032) 1(6.548,8.032) 1(6.548,13.75) 1(6.548,13.75) 1(6.554,8.012) 1(6.554,8.012) 1(6.554,10.52) 1(6.554,10.52) 1(6.56,10.565) 1(6.56,10.565) 1(6.56,16.103) 1(6.56,16.103) 1(6.567,16.084) 1(6.567,16.084) 1(6.58,7.986) 1(6.58,7.986) 1(6.58,16.077) 1(6.58,16.077) 1(6.586,7.348) 1(6.586,7.348) 1(6.586,7.361) 1(6.586,7.361) 1(6.586,7.967) 1(6.586,7.967) 1(6.586,16.058) 1(6.586,16.058) 1(6.599,7.96) 1(6.599,7.96) 1(6.606,16.039) 1(6.606,16.039) 1(6.606,7.941) 1(6.606,7.941) 1(6.612,16.02) 1(6.612,16.02) 1(6.625,7.922) 1(6.625,7.922) 1(6.631,7.903) 1(6.631,7.903) 1(6.631,16) 1(6.631,16) 1(6.644,15.968) 1(6.644,15.968) 1(6.657,7.877) 1(6.657,7.877) 1(6.663,7.857) 1(6.663,7.857) 1(6.663,15.949) 1(6.663,15.949) 1(6.67,15.929) 1(6.67,15.929) 1(6.677,7.251) 1(6.677,7.251) 1(6.677,7.264) 1(6.677,7.264) 1(6.689,15.91) 1(6.689,15.91) 1(6.689,7.832) 1(6.689,7.832) 1(6.696,7.812) 1(6.696,7.812) 1(6.696,15.891) 1(6.696,15.891) 1(6.709,7.806) 1(6.709,7.806) 1(6.709,11.152) 1(6.709,11.152) 1(6.715,7.786) 1(6.715,7.786) 1(6.728,15.845) 1(6.728,15.845) 1(6.735,7.767) 1(6.735,7.767) 1(6.735,15.826) 1(6.735,15.826) 1(6.741,7.18) 1(6.741,7.18) 1(6.741,7.193) 1(6.741,7.193) 1(6.741,7.748) 1(6.741,7.748) 1(6.754,7.741) 1(6.754,7.741) 1(6.76,7.722) 1(6.76,7.722) 1(6.76,11.332) 1(6.76,11.332) 1(6.767,15.781) 1(6.767,15.781) 1(6.773,11.423) 1(6.773,11.423) 1(6.779,7.703) 1(6.779,7.703) 1(6.786,7.683) 1(6.786,7.683) 1(6.799,11.513) 1(6.799,11.513) 1(6.806,11.571) 1(6.806,11.571) 1(6.812,7.657) 1(6.812,7.657) 1(6.818,7.638) 1(6.818,7.638) 1(6.825,11.629) 1(6.825,11.629) 1(6.831,11.687) 1(6.831,11.687) 1(6.831,15.658) 1(6.831,15.658) 1(6.838,7.619) 1(6.838,7.619) 1(6.838,15.626) 1(6.838,15.626) 1(6.844,7.599) 1(6.844,7.599) 1(6.85,11.745) 1(6.85,11.745) 1(6.85,15.614) 1(6.85,15.614) 1(6.857,7.593) 1(6.857,7.593) 1(6.857,11.803) 1(6.857,11.803) 1(6.857,15.581) 1(6.857,15.581) 1(6.863,7.574) 1(6.863,7.574) 1(6.876,11.861) 1(6.876,11.861) 1(6.876,15.555) 1(6.876,15.555) 1(6.883,11.919) 1(6.883,11.919) 1(6.883,15.523) 1(6.883,15.523) 1(6.889,7.548) 1(6.889,7.548) 1(6.896,7.019) 1(6.896,7.019) 1(6.896,7.032) 1(6.896,7.032) 1(6.896,7.528) 1(6.896,7.528) 1(6.902,11.977) 1(6.902,11.977) 1(6.908,7.522) 1(6.908,7.522) 1(6.908,15.478) 1(6.908,15.478) 1(6.915,7.503) 1(6.915,7.503) 1(6.941,7.477) 1(6.941,7.477) 1(6.941,12.209) 1(6.941,12.209) 1(6.947,7.458) 1(6.947,7.458) 1(6.947,15.368) 1(6.947,15.368) 1(6.954,12.241) 1(6.954,12.241) 1(6.96,12.312) 1(6.96,12.312) 1(6.967,6.942) 1(6.967,6.942) 1(6.967,6.955) 1(6.967,6.955) 1(6.967,7.445) 1(6.967,7.445) 1(6.973,7.426) 1(6.973,7.426) 1(6.979,12.39) 1(6.979,12.39) 1(6.986,7.419) 1(6.986,7.419) 1(6.986,12.474) 1(6.986,12.474) 1(6.986,15.259) 1(6.986,15.259) 1(6.992,7.399) 1(6.992,7.399) 1(7.005,7.393) 1(7.005,7.393) 1(7.012,7.374) 1(7.012,7.374) 1(7.018,12.635) 1(7.018,12.635) 1(7.025,7.367) 1(7.025,7.367) 1(7.025,12.718) 1(7.025,12.718) 1(7.031,7.348) 1(7.031,7.348) 1(7.031,15.078) 1(7.031,15.078) 1(7.037,15.02) 1(7.037,15.02) 1(7.044,7.341) 1(7.044,7.341) 1(7.044,12.802) 1(7.044,12.802) 1(7.05,7.322) 1(7.05,7.322) 1(7.069,14.898) 1(7.069,14.898) 1(7.076,7.297) 1(7.076,7.297) 1(7.083,7.277) 1(7.083,7.277) 1(7.089,13.17) 1(7.089,13.17) 1(7.096,6.806) 1(7.096,6.806) 1(7.096,6.819) 1(7.096,6.819) 1(7.108,7.251) 1(7.108,7.251) 1(7.115,7.232) 1(7.115,7.232) 1(7.115,14.575) 1(7.115,14.575) 1(7.128,13.634) 1(7.128,13.634) 1(7.134,14.227) 1(7.134,14.227) 1(7.141,7.206) 1(7.141,7.206) 1(7.147,7.187) 1(7.147,7.187) 1(7.16,7.18) 1(7.16,7.18) 1(7.166,7.161) 1(7.166,7.161) 1(7.179,6.716) 1(7.179,6.716) 1(7.179,6.729) 1(7.179,6.729) 1(7.179,7.155) 1(7.179,7.155) 1(7.186,7.135) 1(7.186,7.135) 1(7.198,7.129) 1(7.198,7.129) 1(7.205,7.109) 1(7.205,7.109) 1(7.218,7.103) 1(7.218,7.103) 1(7.225,6.664) 1(7.225,6.664) 1(7.225,6.678) 1(7.225,6.678) 1(7.225,7.084) 1(7.225,7.084) 1(7.237,7.077) 1(7.237,7.077) 1(7.244,7.058) 1(7.244,7.058) 1(7.257,7.051) 1(7.257,7.051) 1(7.263,7.032) 1(7.263,7.032) 1(7.276,7.026) 1(7.276,7.026) 1(7.283,7.006) 1(7.283,7.006) 1(7.295,7) 1(7.295,7) 1(7.302,6.98) 1(7.302,6.98) 1(7.327,6.955) 1(7.327,6.955) 1(7.334,6.935) 1(7.334,6.935) 1(7.347,6.929) 1(7.347,6.929) 1(7.354,6.91) 1(7.354,6.91) 1(7.366,6.903) 1(7.366,6.903) 1(7.373,6.884) 1(7.373,6.884) 1(7.379,6.503) 1(7.379,6.503) 1(7.379,6.516) 1(7.379,6.516) 1(7.386,6.878) 1(7.386,6.878) 1(7.392,6.858) 1(7.392,6.858) 1(7.418,6.832) 1(7.418,6.832) 1(7.424,6.813) 1(7.424,6.813) 1(7.431,6.458) 1(7.431,6.458) 1(7.431,6.445) 1(7.431,6.445) 1(7.444,6.8) 1(7.444,6.8) 1(7.45,6.781) 1(7.45,6.781) 1(7.463,6.774) 1(7.463,6.774) 1(7.469,6.755) 1(7.469,6.755) 1(7.483,6.749) 1(7.483,6.749) 1(7.489,6.729) 1(7.489,6.729) 1(7.495,6.374) 1(7.495,6.374) 1(7.495,6.387) 1(7.495,6.387) 1(7.502,6.722) 1(7.502,6.722) 1(7.508,6.703) 1(7.508,6.703) 1(7.521,6.697) 1(7.521,6.697) 1(7.527,6.678) 1(7.527,6.678) 1(7.54,6.671) 1(7.54,6.671) 1(7.547,6.652) 1(7.547,6.652) 1(7.56,6.645) 1(7.56,6.645) 1(7.566,6.626) 1(7.566,6.626) 1(7.579,6.62) 1(7.579,6.62) 1(7.585,6.6) 1(7.585,6.6) 1(7.598,6.593) 1(7.598,6.593) 1(7.605,6.574) 1(7.605,6.574) 1(7.611,6.252) 1(7.611,6.252) 1(7.611,6.265) 1(7.611,6.265) 1(7.617,6.568) 1(7.617,6.568) 1(7.624,6.549) 1(7.624,6.549) 1(7.65,6.523) 1(7.65,6.523) 1(7.656,6.503) 1(7.656,6.503) 1(7.669,6.497) 1(7.669,6.497) 1(7.676,6.478) 1(7.676,6.478) 1(7.689,6.471) 1(7.689,6.471) 1(7.695,6.452) 1(7.695,6.452) 1(7.708,6.149) 1(7.708,6.149) 1(7.708,6.162) 1(7.708,6.162) 1(7.721,6.426) 1(7.721,6.426) 1(7.727,6.407) 1(7.727,6.407) 1(7.74,6.4) 1(7.74,6.4) 1(7.746,6.381) 1(7.746,6.381) 1(7.753,6.097) 1(7.753,6.097) 1(7.753,6.11) 1(7.753,6.11) 1(7.76,6.374) 1(7.76,6.374) 1(7.766,6.355) 1(7.766,6.355) 1(7.792,6.33) 1(7.792,6.33) 1(7.798,6.31) 1(7.798,6.31) 1(7.811,6.303) 1(7.811,6.303) 1(7.817,6.284) 1(7.817,6.284) 1(7.843,6.259) 1(7.843,6.259) 1(7.85,6.239) 1(7.85,6.239) 1(7.869,6.226) 1(7.869,6.226) 1(7.875,6.207) 1(7.875,6.207) 1(7.888,6.201) 1(7.888,6.201) 1(7.895,5.949) 1(7.895,5.949) 1(7.895,5.962) 1(7.895,5.962) 1(7.895,6.181) 1(7.895,6.181) 1(7.914,6.168) 1(7.914,6.168) 1(7.921,6.149) 1(7.921,6.149) 1(7.934,6.142) 1(7.934,6.142) 1(7.94,5.897) 1(7.94,5.897) 1(7.94,5.91) 1(7.94,5.91) 1(7.94,6.123) 1(7.94,6.123) 1(7.953,6.116) 1(7.953,6.116) 1(7.96,6.097) 1(7.96,6.097) 1(7.972,6.091) 1(7.972,6.091) 1(7.979,6.072) 1(7.979,6.072) 1(8.004,5.826) 1(8.004,5.826) 1(8.004,5.839) 1(8.004,5.839) 1(8.004,6.045) 1(8.004,6.045) 1(8.011,6.026) 1(8.011,6.026) 1(8.037,6.001) 1(8.037,6.001) 1(8.043,5.981) 1(8.043,5.981) 1(8.056,5.975) 1(8.056,5.975) 1(8.063,5.762) 1(8.063,5.762) 1(8.063,5.775) 1(8.063,5.775) 1(8.063,5.955) 1(8.063,5.955) 1(8.082,5.743) 1(8.082,5.743) 1(8.082,5.755) 1(8.082,5.755) 1(8.088,5.755) 1(8.088,5.755) 1(8.088,5.93) 1(8.088,5.93) 1(8.095,5.749) 1(8.095,5.749) 1(8.108,5.884) 1(8.108,5.884) 1(8.127,5.755) 1(8.127,5.755) 1(8.127,5.762) 1(8.127,5.762) 1(8.127,5.865) 1(8.127,5.865) 1(8.133,5.846) 1(8.133,5.846) 1(8.153,5.833) 1(8.153,5.833) 1(8.172,5.743) 1(8.172,5.743) 1(8.172,5.749) 1(8.172,5.749) 1(8.179,5.788) 1(8.179,5.788) 1(8.192,5.736) 1(8.192,5.736)

## Via types
v1: diameter 0.7, hole 0.35, Top Layer to Bottom Layer, tented both sides, 22 vias